# EAGLE board MOD-v2-5 (EAGLE 8.3.2)
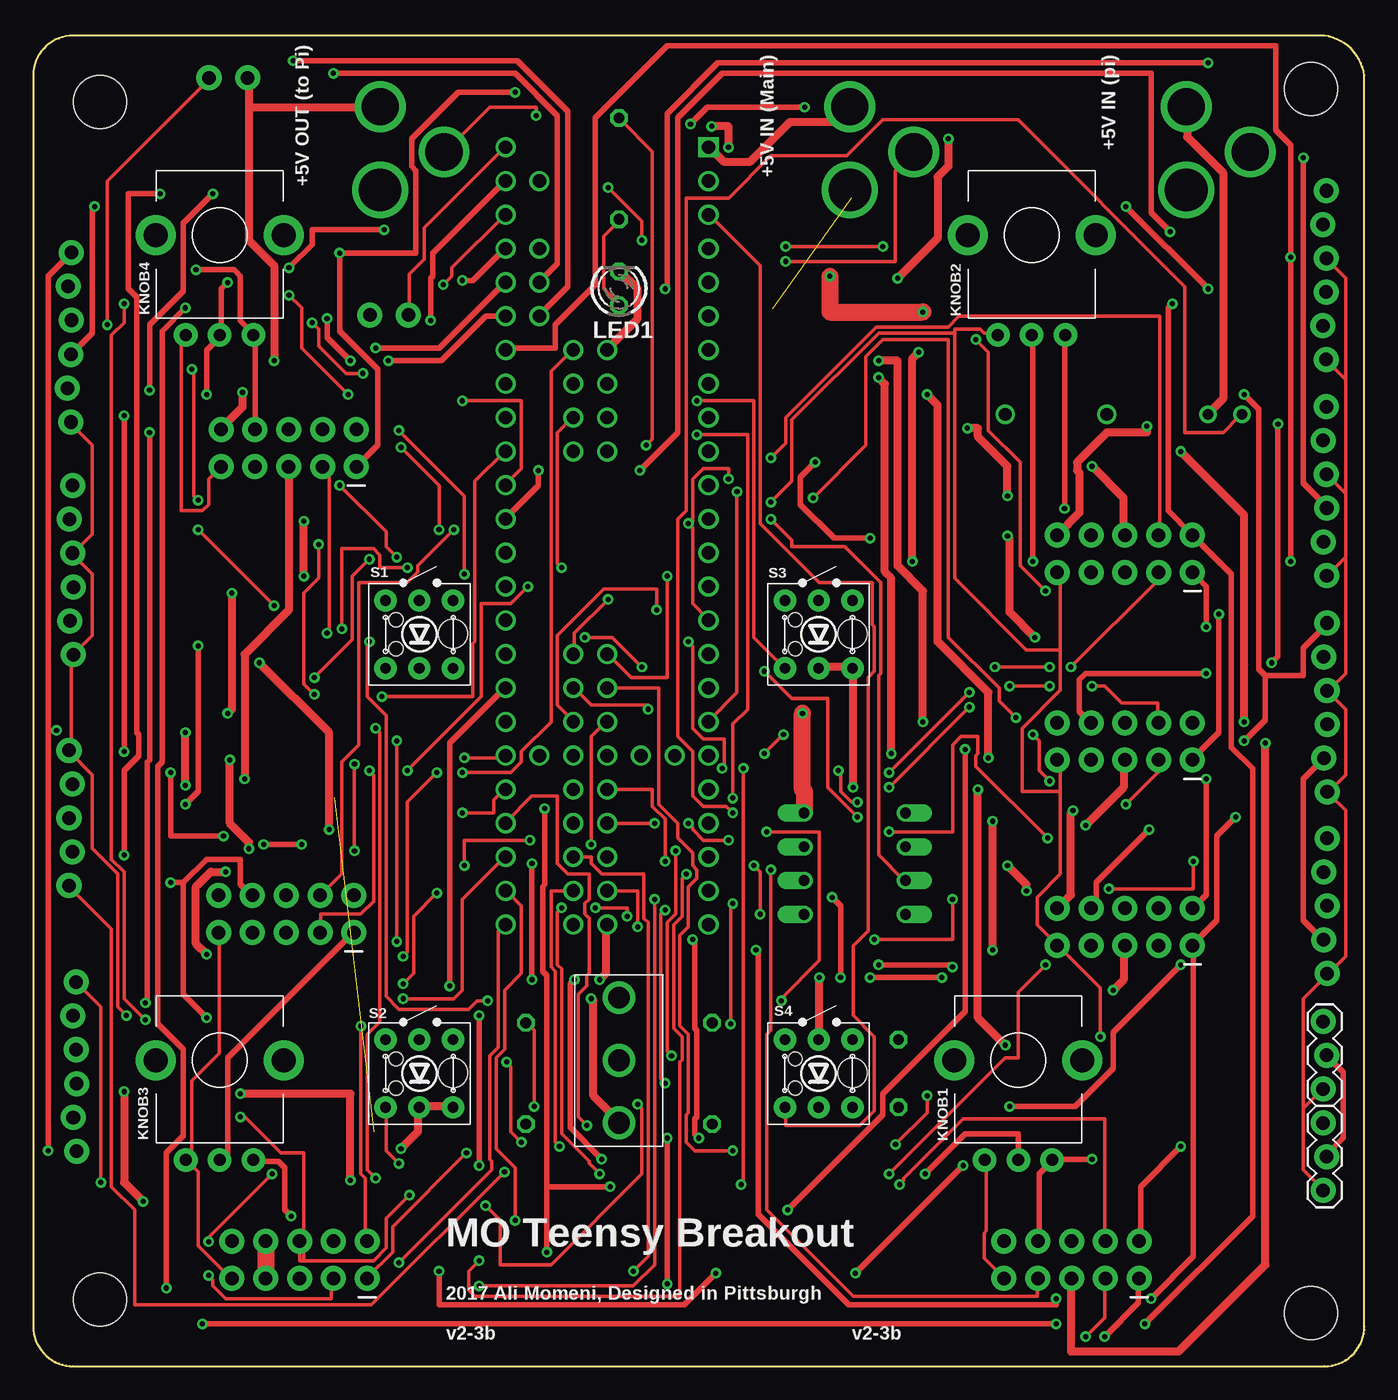
[diagram p0: board, top side]
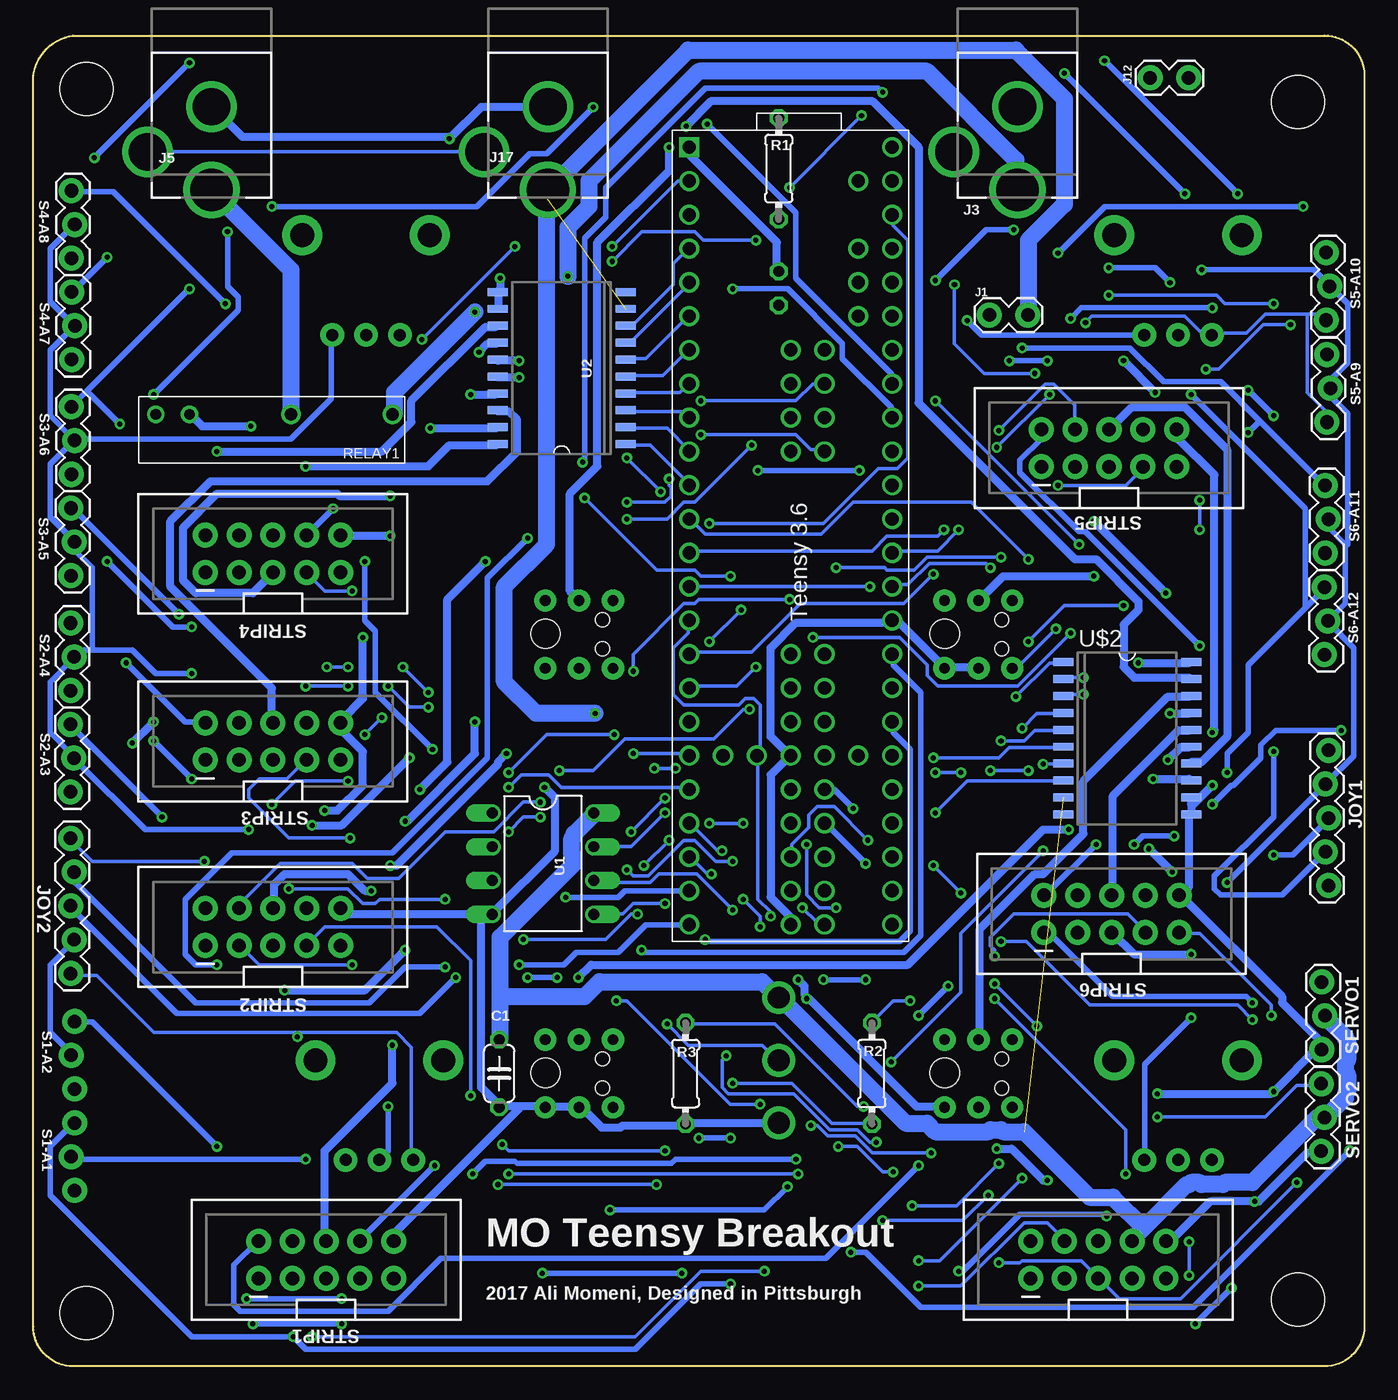
[diagram p1: board, bottom side, seen from below]

Size 100 x 100 mm. Coordinates in mm from the lower left corner, seen from the top.
Outline: 3,100 arc90 0,97 0,3 arc90 3,0 97,0 arc90 100,3 100,97 arc74 97,100 3,100
Copper layers (1*16): Top 0.035559375mm / dielectric 1.501140625mm / Bottom 0.035559375mm
Design rules "typical_4pcb *": minimum track width 10mil, minimum drill 15mil, track to track 6mil, track to pad 10mil, pad to pad 10mil, via to via 10mil, smd to smd 10mil, copper to edge 15mil, drill to drill 8mil, minimum pad ring 10mil, minimum via ring 8mil, stop-mask expansion 4mil, vias tented up to drill 0mil, thermal gap 10mil
Net classes: 2 Power: width 0.61 mm, clearance 0.305 mm; 3 Analog Sig: width 0.406 mm, clearance 0.305 mm; 4 Power Source: width 1.27 mm, clearance 0.305 mm
Holes 4 mm at 5,5 96,4 96,96 5,95

## Footprints (pad centres in the part's own frame; a part is rotated, then mirrored left to right if it is on the bottom)
C050-024X044 = drill 0.813 octagon: 1 -2.54,0; 2 2.54,0
1X02_LOCK = drill 1.016 pad 1.88: 1 -0.178,0; 2 2.718,0
DCJACK_2MM_PTH = drill 2.8: GND 0,7.35; GNDBREAK 4.8,10.75 | drill 3.2: PWR 0,13.6
2X5-SHROUDED_LOCK = drill 1.016 pad 1.88: 1 -1.397,5.08; 2 1.397,5.08; 3 -1.397,2.54; 4 1.397,2.54; 5 -1.397,0; 6 1.397,0; 7 -1.397,-2.54; 8 1.397,-2.54; 9 -1.397,-5.08; 10 1.397,-5.08
1X05_LOCK = drill 1.016 pad 1.88: 1 0,0.127; 2 2.54,-0.127; 3 5.08,0.127; 4 7.62,-0.127; 5 10.16,0.127
POT_ALPHA_RD901F-40-(L)R1 = drill 0.9 pad 1.778: 1 -2.54,-7.5; 2 0,-7.5; 3 2.54,-7.5 | drill 1.8 pad 3: M1 -4.8,0; M2 4.8,0
LED3MM = drill 0.813 octagon: A -1.27,0; K 1.27,0
0204/7 = drill 0.813 octagon: 1 -3.81,0; 2 3.81,0
G6DN-1A = drill 0.8: 1 0,0; 2 2.54,0 | drill 0.95: 5 10.16,0; 8 17.78,0
SWITCH_TR2-MOMENTARY-LED = drill 0.8 pad 1.676: 1 2.54,-2.54; 2 2.54,2.54; 3 -2.54,-2.54; 4 -2.54,2.54; A 0,2.54; C 0,-2.54 | hole 2.2: 2.53,0.05 | hole 1.05: -1.76,1.1; -1.76,-1.09
1X03_LOCK = drill 1.016 pad 1.88: 1 0,0.127; 2 2.54,-0.127; 3 5.08,0.127
1X03_LOCK@1 = drill 1.016 pad 1.88: 1 0,0.127; 2 2.54,-0.127; 3 5.08,0.127
SWITCH_SPDT_500SSP1S2M2QEA = drill 1.65: 1 -4.7,0; 2 0,0; 3 4.7,0
TEENSY3-6_NO-USB-HOST = drill 1: 0 3.81,1.27; 1 6.35,1.27; 2 8.89,1.27; 3 11.43,1.27; 3V3(1) 36.83,1.27; 3V3(2) 46.99,6.35; 3V3(3) 6.35,16.51; 3V3(4) 59.69,11.43; 4 13.97,1.27; 5 16.51,1.27; 6 19.05,1.27; 7 21.59,1.27; 8 24.13,1.27; 9 26.67,1.27; 10 29.21,1.27; 11 31.75,1.27; 12 34.29,1.27; 13 34.29,16.51; 14 31.75,16.51; 15 29.21,16.51; 16 26.67,16.51; 17 24.13,16.51; 18 21.59,16.51; 19 19.05,16.51; 20 16.51,16.51; 21 13.97,16.51; 22 11.43,16.51; 23 8.89,16.51; 24 39.37,1.27; 25 41.91,1.27; 26 44.45,1.27; 27 46.99,1.27; 28 49.53,1.27; 29 52.07,1.27; 30 54.61,1.27; 31 57.15,1.27; 32 59.69,1.27; 33 59.69,16.51; 34 57.15,16.51; 35 54.61,16.51; 36 52.07,16.51; 37 49.53,16.51; 38 46.99,16.51; 39 44.45,16.51; 40 39.37,8.89; 41 41.91,8.89; 42 44.45,8.89; 43 49.53,8.89; 44 52.07,8.89; 45 54.61,8.89; 46 57.15,8.89; 47 57.15,11.43; 48 54.61,11.43; 49 52.07,11.43; 50 49.53,11.43; 51 44.45,11.43; 52 41.91,11.43; 53 39.37,11.43; 54 24.13,11.43; 55 21.59,11.43; 56 19.05,11.43; 57 16.51,11.43; A10 11.43,13.97; A11 13.97,13.97; AGND 3.81,16.51; AREF 8.89,13.97; DAC0 41.91,16.51; DAC1 39.37,16.51; DC 21.59,8.89; DD 24.13,8.89; DE 19.05,8.89; G1 46.99,8.89; G2 36.83,16.51; G3 59.69,8.89; G6 16.51,8.89; P 46.99,11.43; R 46.99,13.97; VBAT 46.99,3.81; VIN 1.27,16.51; VUSB 3.81,13.97 | drill 1 square: G0 1.27,1.27
DIL08 = drill 0.813 offset: 1 -3.81,-3.81; 2 -1.27,-3.81; 3 1.27,-3.81; 4 3.81,-3.81; 5 3.81,3.81; 6 1.27,3.81; 7 -1.27,3.81; 8 -3.81,3.81
SOIC20 = smd 0.6 x 1.5: 1 -5.715,-4.8; 2 -4.445,-4.8; 3 -3.175,-4.8; 4 -1.905,-4.8; 5 -0.635,-4.8; 6 0.635,-4.8; 7 1.905,-4.8; 8 3.175,-4.8; 9 4.445,-4.8; 10 5.715,-4.8; 11 5.715,4.8; 12 4.445,4.8; 13 3.175,4.8; 14 1.905,4.8; 15 0.635,4.8; 16 -0.635,4.8; 17 -1.905,4.8; 18 -3.175,4.8; 19 -4.445,4.8; 20 -5.715,4.8

## Placement (x,y rotation side)
C1  10uF  [C050-024X044]  65,22 270 bottom
J1  Teensy-5V  [1X02_LOCK]  28,79 0 bottom
J3  +5V OUT (to Pi)  [DCJACK_2MM_PTH]  26.06,102 180 bottom
J4  ACTUATORS  [2X5-SHROUDED_LOCK]  20,8 90 bottom
J5  +5V IN (Pi)  [DCJACK_2MM_PTH]  86.61,102 180 bottom
J12  RPi-Shutdown  [1X02_LOCK]  13.38,96.82 180 bottom
J17  +5V IN (Main)  [DCJACK_2MM_PTH]  61.34,102 180 bottom
JOY1  JOY1  [1X05_LOCK]  2.81,46.28 270 bottom
JOY2  JOY2  [1X05_LOCK]  97.06,29.52 90 bottom
KNOB1  [POT_ALPHA_RD901F-40-(L)R1]  74,23 0 top
KNOB2  [POT_ALPHA_RD901F-40-(L)R1]  75,85 0 top
KNOB3  [POT_ALPHA_RD901F-40-(L)R1]  14,23 0 top
KNOB4  [POT_ALPHA_RD901F-40-(L)R1]  14,85 0 top
LED1  [LED3MM]  44,81 90 top
R1  330  [0204/7]  44,90 270 bottom
R2  2.2K  [0204/7]  37,22 90 bottom
R3  3.3K  [0204/7]  51,22 270 bottom
RELAY1  RELAY-OMRON-G6DN  [G6DN-1A]  90.8,71.54 0 bottom
S1  SW-LEDPTH  [SWITCH_TR2-MOMENTARY-LED]  29,55 0 top
S1-A1  AN5  [1X03_LOCK]  97.03,13.21 90 top
S1-A2  AN6  [1X03_LOCK]  97.03,20.83 90 top
S2  SW-LEDPTH  [SWITCH_TR2-MOMENTARY-LED]  29,22 0 top
S2-A3  AN7  [1X03_LOCK]  97.08,43.16 90 bottom
S2-A4  AN8  [1X03_LOCK]  97.06,50.77 90 bottom
S3  SW-LEDPTH  [SWITCH_TR2-MOMENTARY-LED]  59,55 0 top
S3-A5  AN5  [1X03_LOCK]  97.04,59.41 90 bottom
S3-A6  AN6  [1X03_LOCK]  97.02,67.03 90 bottom
S4  SW-LEDPTH  [SWITCH_TR2-MOMENTARY-LED]  59,22 0 top
S4-A7  AN7  [1X03_LOCK]  97,75.65 90 bottom
S4-A8  AN8  [1X03_LOCK]  97.01,83.26 90 bottom
S5-A9  AN5  [1X03_LOCK]  2.69,70.95 90 bottom
S5-A10  AN6  [1X03_LOCK]  2.74,78.61 90 bottom
S6-A11  AN7  [1X03_LOCK]  2.83,61.11 90 bottom
S6-A12  AN8  [1X03_LOCK]  2.88,53.47 90 bottom
SERVO1  SERVO1  [1X03_LOCK@1]  3.1,23.79 90 bottom
SERVO2  SERVO2  [1X03_LOCK@1]  3.13,16.16 90 bottom
STRIP1  [2X5-SHROUDED_LOCK]  78,8 90 bottom
STRIP2  [2X5-SHROUDED_LOCK]  82,33.01 90 bottom
STRIP3  [2X5-SHROUDED_LOCK]  82,46.96 90 bottom
STRIP4  [2X5-SHROUDED_LOCK]  82,61.05 90 bottom
STRIP5  [2X5-SHROUDED_LOCK]  19.19,69 90 bottom
STRIP6  [2X5-SHROUDED_LOCK]  19,33.99 90 bottom
SW2  500SSP1S2M2QEA  [SWITCH_SPDT_500SSP1S2M2QEA]  44,23 270 top
TEENSY  TEENSY3_6-ALI_NO-USB-HOST  [TEENSY3-6_NO-USB-HOST]  51.99,92.88 270 bottom
U1  ATTINY85  [DIL08]  61.71,37.77 270 bottom
U2  A2982  [SOIC20]  60.31,75.01 90 bottom
U$2  A2982  [SOIC20]  17.82,47.19 270 bottom

## Library data of the parts
C1 = resistor
J1 S1-A1 S1-A2 = SparkFun-Connectors
J3 J5 J17 = adafruit
J4 STRIP1-STRIP6 = SparkFun-Connectors; PROD_ID: CONN-08671; SF_ID: PRT-08506
J12 = SparkFun-Connectors; GND: GND; SIG: SIG
JOY1 = SparkFun-Connectors; B: B; GND: gnd; H: H; V: V; VCC: vcc
JOY2 = SparkFun-Connectors; B: B; GND: GND; H: H; V: V; VCC: VCC
KNOB1-KNOB4 RELAY1 S1-S4 TEENSY U1 U2 U$2 = CMU-ArtFab
LED1 = led; GND: -; P: +
R1-R3 = rcl
S2-A3 = SparkFun-Connectors; AN3: AN3; GND: GND; VCC: VCC
S2-A4 = SparkFun-Connectors; AN4: AN4; GND: GND; VCC: VCC
S3-A5 = SparkFun-Connectors; AN5: AN5; GND: GND; VCC: VCC
S3-A6 = SparkFun-Connectors; AN6: AN6; GND: GND; VCC: VCC
S4-A7 = SparkFun-Connectors; AN7: AN7; GND: GND; VCC: VCC
S4-A8 = SparkFun-Connectors; AN8: AN8; GND: GND; VCC: VCC
S5-A9 = SparkFun-Connectors; AN9: AN9; GND: GND; VCC: VCC
S5-A10 = SparkFun-Connectors; AN10: AN10; GND: GND; VCC: VCC
S6-A11 = SparkFun-Connectors; AN11: AN11; GND: GND; VCC: VCC
S6-A12 = SparkFun-Connectors; AN12: AN12; GND: GND; VCC: VCC
SERVO1 SERVO2 = SparkFun-Connectors; 5V: +5V; GND: GND; SIG: SIG
SW2 = CMU-ArtFab; DIGIKEY: EG5137-ND

## Nets
+3V3: J4.9 JOY1.1 JOY2.1 KNOB1.1 KNOB2.1 KNOB3.1 KNOB4.1 S1-A1.1 S1-A2.1 S2-A3.1 S2-A4.1 S3-A5.1 S3-A6.1 S4-A7.1 S4-A8.1 S5-A9.1 S5-A10.1 S6-A11.1 S6-A12.1 STRIP1.9 STRIP2.9 STRIP3.9 STRIP4.9 STRIP5.9 STRIP6.9 TEENSY.3V3(1) TEENSY.3V3(2) TEENSY.3V3(3) TEENSY.3V3(4)
+5V [Power Source]: C1.1 J1.2 J4.7 J4.8 J17.PWR SERVO1.2 SERVO2.2 SW2.1 U1.8 U2.9 U$2.9
+5V-BATTERY-PI [Power Source]: J5.PWR RELAY1.5
AGND [Analog Sig]: JOY1.2 JOY2.2 KNOB1.3 KNOB2.3 KNOB3.3 KNOB4.3 S1-A1.2 S1-A2.2 S2-A3.2 S2-A4.2 S3-A5.2 S3-A6.2 S4-A7.2 S4-A8.2 S5-A9.2 S5-A10.2 S6-A11.2 S6-A12.2 STRIP1.8 STRIP2.8 STRIP3.8 STRIP4.8 STRIP5.8 STRIP6.8 TEENSY.AGND
AN1 [Analog Sig]: S1-A1.3 STRIP1.1 TEENSY.39
AN2 [Analog Sig]: S1-A2.3 STRIP1.2 TEENSY.DAC0
AN3 [Analog Sig]: S2-A3.3 STRIP2.1 TEENSY.DAC1
AN4 [Analog Sig]: S2-A4.3 STRIP2.2 TEENSY.15
AN5 [Analog Sig]: S3-A5.3 STRIP3.1 TEENSY.18
AN6 [Analog Sig]: S3-A6.3 STRIP3.2 TEENSY.19
AN7 [Analog Sig]: S4-A7.3 STRIP4.1 TEENSY.20
AN8 [Analog Sig]: S4-A8.3 STRIP4.2 TEENSY.21
AN9 [Analog Sig]: KNOB1.2 S5-A9.3 STRIP5.1 TEENSY.49
AN10 [Analog Sig]: KNOB2.2 S5-A10.3 STRIP5.2 TEENSY.50
AN11 [Analog Sig]: KNOB3.2 S6-A11.3 STRIP6.1 TEENSY.22
AN12 [Analog Sig]: KNOB4.2 S6-A12.3 STRIP6.2 TEENSY.23
BTN1: STRIP1.3 TEENSY.48
BTN2: STRIP1.4 TEENSY.51
BTN3: STRIP2.3 TEENSY.42
BTN4: STRIP2.4 TEENSY.52
BTN5: STRIP3.3 TEENSY.40
BTN6: STRIP3.4 TEENSY.28
BTN7: STRIP4.3 TEENSY.27
BTN8: STRIP4.4 TEENSY.26
BTN9: STRIP5.3 TEENSY.25
BTN10: STRIP5.4 TEENSY.24
BTN11: STRIP6.3 TEENSY.12
BTN12: STRIP6.4 TEENSY.11
BTN13: S1.3 TEENSY.13
BTN14: S2.3 TEENSY.54
BTN15: S3.3 TEENSY.56
BTN16: S4.3 TEENSY.1
GND [Power]: C1.2 J3.GND J4.10 J5.GND J12.2 J17.GND LED1.K R3.2 RELAY1.2 S1.1 S1.C S2.1 S2.C S3.1 S3.C S4.1 S4.C SERVO1.1 SERVO2.1 STRIP1.10 STRIP2.10 STRIP3.10 STRIP4.10 STRIP5.10 STRIP6.10 SW2.3 TEENSY.G0 TEENSY.G1 TEENSY.G2 TEENSY.G3 TEENSY.G6 U1.4 U2.11 U2.12 U$2.11 U$2.12
GNDBREAK: J3.GNDBREAK J5.GNDBREAK J17.GNDBREAK
JOYB1: JOY1.5 TEENSY.47
JOYB2: JOY2.5 TEENSY.44
JOYH1 [Analog Sig]: JOY1.3 TEENSY.A11
JOYH2 [Analog Sig]: JOY2.3 TEENSY.31
JOYV1 [Analog Sig]: JOY1.4 TEENSY.A10
JOYV2 [Analog Sig]: JOY2.4 TEENSY.32
LED1: STRIP1.7 TEENSY.43
LED2: STRIP2.7 TEENSY.41
LED3: STRIP3.7 TEENSY.53
LED4: STRIP4.7 TEENSY.0
LED5: STRIP5.7 TEENSY.55
LED6: STRIP6.7 TEENSY.57
M_INA: J4.2 TEENSY.45
M_INB: J4.4 TEENSY.46
M_PWMA: J4.1 TEENSY.36
M_PWMB: J4.3 TEENSY.35
N$2: LED1.A R1.2
N$5: J12.1 R2.2 R3.1
N$7: J1.1 TEENSY.VIN
PI-REST: R2.1 U1.6
PWM1: TEENSY.2 U2.8
PWM2: TEENSY.3 U2.7
PWM3: TEENSY.4 U2.6
PWM4: TEENSY.5 U2.5
PWM5: TEENSY.6 U2.4
PWM6: TEENSY.7 U2.3
PWM7: TEENSY.8 U2.2
PWM8: TEENSY.9 U2.1
PWM9: TEENSY.37 U$2.8
PWM10: TEENSY.29 U$2.7
PWM11: TEENSY.38 U$2.6
PWM12: TEENSY.14 U$2.5
PWM13: TEENSY.30 U$2.4
PWM14: TEENSY.16 U$2.3
PWM15: TEENSY.10 U$2.2
PWM16: TEENSY.17 U$2.1
PWM_1 [Power]: STRIP1.5 U2.13
PWM_2 [Power]: STRIP1.6 U2.14
PWM_3 [Power]: STRIP2.5 U2.15
PWM_4 [Power]: STRIP2.6 U2.16
PWM_5 [Power]: STRIP3.5 U2.17
PWM_6 [Power]: STRIP3.6 U2.18
PWM_7 [Power]: STRIP4.5 U2.19
PWM_8 [Power]: STRIP4.6 U2.20
PWM_9 [Power]: STRIP5.5 U$2.13
PWM_10 [Power]: STRIP5.6 U$2.14
PWM_11 [Power]: STRIP6.5 U$2.15
PWM_12 [Power]: STRIP6.6 U$2.16
PWM_13 [Power]: S1.A U$2.17
PWM_14 [Power]: S2.A U$2.18
PWM_15 [Power]: S3.A U$2.19
PWM_16 [Power]: S4.A U$2.20
RELAY-PWR [Power Source]: J3.PWR RELAY1.8
S1: J4.5 SERVO1.3 TEENSY.33
S2: J4.6 SERVO2.3 TEENSY.34
TINY_LED: R1.1 U1.3
TINY_RELAY: RELAY1.1 U1.7
TINY_SWITCH: SW2.2 U1.5

## Tracks (layer width: path | path; a pad name or v marks a point on that pad's centre or on a via)
+3V3  (via drill 0.38)
  Top 0.254: J4.9 14.76,6.67 12.38,9.05 12.38,14.61 11.59,15.4 KNOB3.1 11.91,15.24 11.91,21.43 13.97,23.5 13.97,32.54 STRIP6.9 | STRIP5.9 13.97,67.47 13.18,66.67 13.18,64.77 12.7,64.29 11.11,64.29 11.11,77.15 11.43,77.47 KNOB4.1 | S5-A9.1 2.86,70.8 4.45,69.22 4.45,62.55 3.02,61.12 S6-A11.1 3.02,60.96 4.45,59.53 4.45,54.93 3.02,53.5 S6-A12.1 2.86,53.34 2.86,46.51 2.7,46.35 JOY1.1 2.7,46.2 4.45,44.45 4.45,38.89 6.35,36.99 6.35,26.99 v6.99,26.35 | v42.23,34.45 44.61,34.45 v44.61,33.81 | TEENSY.3V3(1) 50.64,56.2 49.53,57.31 49.53,63.02 v49.21,63.34 49.37,63.34 49.53,63.5 49.53,66.67 50.32,67.47 52.23,67.47 v52.23,66.67 | 77.15,43.18 77.15,45.4 76.99,45.56 STRIP3.9 | 77.15,43.18 77.15,36.99 75.41,35.24 75.41,33.18 76.83,31.75 STRIP2.9 76.99,31.59 80.17,28.42 v80.17,24.77 | 69.22,77.63 69.22,59.21 74.61,53.82 77.15,53.82 | 69.22,77.63 69.22,77.95 71.12,77.95 71.44,77.63 72.39,77.63 KNOB2.1 | 77.15,53.82 77.15,59.37 76.99,59.53 STRIP4.9 | 77.15,43.18 74.3,43.18 74.3,47.94 77.15,50.8 77.15,53.82 | 98.5,60.72 98.58,60.8 98.58,65.56 98.5,65.64 | 98.5,60.72 97.31,59.53 S3-A5.1 | 98.5,65.64 97.16,66.99 S3-A6.1 | 98.5,74.22 98.58,74.14 98.58,65.72 98.5,65.64 | 98.5,74.22 97.16,75.56 S4-A7.1 | S4-A8.1 97.16,83.19 98.58,81.76 98.58,74.3 98.5,74.22 | 98.5,60.72 98.58,60.64 98.58,52.07 97.31,50.8 S2-A4.1 97.31,50.64 98.58,49.37 98.58,44.45 97.31,43.18 S2-A3.1 97.31,43.02 98.58,41.75 98.58,30.8 97.31,29.53 JOY2.1 97.16,29.37 95.41,27.62 95.41,19.53 95.49,19.45 | KNOB1.1 71.6,15.4 71.6,10.16 71.44,10 71.44,8.1 72.87,6.67 STRIP1.9 | 95.49,19.45 96.84,20.8 S1-A2.1 | 95.49,19.45 95.41,19.37 95.41,14.76 96.84,13.34 S1-A1.1
  Top 0.254: v55.4,64.93 56.99,66.52 56.99,71.12 63.5,77.63 69.22,77.63 | v20.95,78.42 21.43,77.95 21.43,76.68 23.5,74.61 v24.77,74.61 | v30.8,81.28 31.43,81.92 31.43,82.55 35.4,86.52 TEENSY.3V3(3)
  Bottom 0.254: 4.29,79.06 3.33,79.06 3.02,78.74 S5-A10.1 | 4.29,79.06 7.46,79.06 8.89,77.63 11.43,77.63 KNOB4.1 11.59,77.63 12.22,77.63 13.49,78.9 20.48,78.9 v20.95,78.42 | 4.29,79.06 4.29,73.18 2.86,71.75 2.86,70.96 S5-A9.1 | v6.99,26.35 6.99,27.15 12.38,32.54 13.81,32.54 STRIP6.9 | v42.23,34.45 41.12,33.34 40.64,33.34 TEENSY.3V3(4) | v44.61,33.81 44.61,34.13 45.56,35.08 45.56,45.88 TEENSY.3V3(2) 45.56,46.04 45.4,46.2 45.4,49.69 45.88,50.16 46.51,50.16 46.99,49.69 51.12,49.69 51.91,50.48 51.91,53.98 50.8,55.09 50.8,56.04 TEENSY.3V3(1) | v49.21,63.34 40.64,63.34 36.51,67.47 35.08,67.47 34.29,68.26 34.29,84.61 35.4,85.72 35.4,86.52 TEENSY.3V3(3) | 80.17,25.08 90.96,25.08 95.25,29.37 97.16,29.37 JOY2.1 | 80.17,25.08 72.71,25.08 71.6,23.97 71.6,15.56 KNOB1.1 | 80.17,25.08 v80.17,24.77 | v52.23,66.67 52.23,66.2 52.07,66.04 52.07,65.41 52.55,64.93 v55.4,64.93 | v24.77,74.61 28.57,74.61 30.8,76.83 v30.8,81.28
+5V  (via drill 0.38)  (2 unrouted)
  Top 1.27: J4.7 17.46,6.67 17.46,9.37 J4.8 | v57.78,49.05 57.78,43.34 57.94,43.18 57.94,41.59 U1.8
  Bottom 1.27: J1.2 25.24,79.06 25.24,84.61 22.54,87.31 22.54,95.25 26.19,98.9 50.8,98.9 61.28,88.42 J17.PWR 61.44,87.79 61.44,61.75 64.61,58.58 64.61,51.44 62.23,49.05 v57.78,49.05 | SERVO1.2 2.86,26.19 1.43,24.77 1.43,24.61 1.27,24.45 1.27,23.02 1.43,22.86 1.43,22.07 1.27,21.91 1.27,20.64 1.43,20.48 1.43,20.16 2.86,18.73 SERVO2.2 3.49,18.73 8.41,13.81 10.48,13.81 10.64,13.65 12.22,13.65 12.38,13.81 13.02,13.81 13.18,13.65 13.34,13.65 16.59,10.4 | 16.59,10.4 17.3,9.68 17.3,9.53 J4.8 | 64.93,27.78 64.93,24.61 C1.1 | 64.93,27.78 64.93,32.23 59.37,37.78 59.37,38.26 59.53,38.42 59.53,39.69 59.37,39.85 59.37,40.01 57.94,41.43 U1.8 | 64.93,27.78 58.58,27.78 57.47,28.89 45.24,28.89 44.13,27.78 SW2.1 43.5,27.3 34.45,18.26 32.86,18.26 32.23,17.62 28.26,17.62 28.1,17.78 27.3,17.78 27.15,17.62 25.56,17.62 20.64,12.7 18.89,12.7 16.59,10.4
+5V-BATTERY-PI
  Bottom 1.27: RELAY1.5 80.64,71.6 80.64,82.39 86.52,88.27 J5.PWR
AGND  (via drill 0.38)
  Top 0.406: STRIP1.8 75.56,9.53 75.56,14.45 76.52,15.4 KNOB1.3 76.68,15.56 v79.53,15.56 | S1-A1.2 97.16,15.88 98.42,17.14 98.42,22.07 97.16,23.34 S1-A2.2 | v77.47,64.45 77.47,77.47 KNOB2.3 | v83.82,40.32 79.85,36.35 79.85,34.77 79.53,34.45 STRIP2.8 | v88.11,52.07 79.06,52.07 78.58,51.59 78.58,49.21 79.38,48.42 STRIP3.8 | JOY2.2 96.84,32.07 95.41,33.5 95.41,44.13 96.84,45.56 S2-A3.2 | v29.84,78.58 29.84,81.76 30,81.92 30,83.66 35.4,89.06 TEENSY.AGND | STRIP5.8 16.67,70.48 16.67,77.47 KNOB4.3 16.51,77.63 15.56,78.58 15.56,81.92 15.08,82.39 v12.22,82.39 | v13.02,26.19 11.27,27.94 11.27,36.35 | 11.27,36.35 13.02,38.1 15.56,38.1 15.56,36.2 16.35,35.4 STRIP6.8 | v10.32,36.35 11.27,36.35 | v61.75,6.99 v69.85,15.08 | v51.28,6.99 48.9,4.6 30.48,4.6 v30.48,7.14 | v19.37,11.27 18.89,11.75 18.89,14.92 18.41,15.4 16.67,15.4 KNOB3.3
  Bottom 0.406: JOY2.2 97,31.91 98.74,30.16 98.74,25.08 97.16,23.5 S1-A2.2 | v79.53,15.56 97,15.56 97.16,15.72 S1-A1.2 | S4-A8.2 97,85.72 98.74,83.98 98.74,80.01 97,78.26 S4-A7.2 97,78.11 98.74,76.36 98.74,71.44 97,69.69 S3-A6.2 | KNOB2.3 77.63,77.47 77.63,72.71 80.64,69.69 96.84,69.69 S3-A6.2 | v77.47,64.45 79.38,62.55 STRIP4.8 | v83.82,40.32 91.6,40.32 96.84,45.56 S2-A3.2 97,45.88 98.74,47.62 98.74,51.44 97,53.18 S2-A4.2 96.84,53.34 96.36,53.82 95.57,53.82 | v88.11,52.07 90.81,52.07 92.55,53.82 95.57,53.82 | 95.57,53.82 95.57,60.01 96.84,61.28 96.84,61.91 S3-A5.2 97,62.07 98.74,63.82 98.74,67.79 97,69.53 S3-A6.2 | v29.84,78.58 28.73,77.47 16.67,77.47 KNOB4.3 | v13.02,26.19 16.51,22.7 16.51,15.56 KNOB3.3 | 1.43,61.75 2.7,63.02 2.7,63.5 S6-A11.2 | 1.43,61.75 1.43,57.31 2.7,56.04 S6-A12.2 2.7,55.88 0.79,53.98 0.79,45.88 2.86,43.81 JOY1.2 3.02,43.66 v10.32,36.35 | 1.43,61.75 1.27,61.75 1.27,71.6 2.54,72.87 2.54,73.34 S5-A9.2 2.54,73.5 2.54,74.14 1.27,75.41 1.27,79.85 2.54,81.12 S5-A10.2 2.7,81.28 3.81,82.39 v12.22,82.39 | v69.85,15.08 75.41,9.53 STRIP1.8 | v51.28,6.99 v61.75,6.99 | v30.48,7.14 30.16,7.14 25.88,11.43 19.53,11.43 v19.37,11.27
AN1  (via drill 0.38)
  Top 0.406: v49.53,32.07 49.69,31.91 49.69,25.4 49.85,25.24 49.85,18.73 49.69,18.57 49.69,17.46 v50.01,17.14 | v47.62,6.19 v47.62,17.14 | v80.49,2.22 83.03,4.76 83.03,6.51 STRIP1.1
  Bottom 0.406: v49.53,32.07 49.37,31.91 34.92,31.91 34.13,32.7 34.13,46.35 35.4,47.62 35.4,48.42 TEENSY.39 | v47.62,17.14 v50.01,17.14 | v47.62,6.19 49.85,6.19 54.77,1.27 79.53,1.27 v80.49,2.22 88.11,2.22 98.74,12.86 98.74,16.51 97,18.26 S1-A1.3
AN2  (via drill 0.38)
  Top 0.406: v31.27,28.57 31.27,46.83 35.4,50.96 TEENSY.DAC0 | v33.5,15.08 v33.5,26.35 | v86.2,16.51 83.19,13.49 83.19,9.53 STRIP1.2
  Bottom 0.406: v33.5,26.35 v31.27,28.57 | v33.5,15.08 40.48,8.1 69.37,8.1 73.34,4.13 84.45,4.13 84.93,4.6 84.93,7.62 83.19,9.37 STRIP1.2 | v86.2,16.51 95.57,25.88 96.84,25.88 S1-A2.3
AN3  (via drill 0.38)
  Top 0.406: v54.29,31.27 54.45,31.11 54.45,11.43 61.28,4.6 76.83,4.6 v76.83,5.08 | v83.98,5.08 87.15,8.26 87.15,31.59 STRIP2.1 87.15,31.75 88.9,33.5 88.9,39.85 v90.33,41.27
  Bottom 0.406: v54.29,31.27 54.13,31.11 34.61,31.11 33.34,32.38 33.34,50.64 35.4,52.7 35.4,53.5 TEENSY.DAC1 | v83.98,5.08 v76.83,5.08 | v90.33,41.27 97.16,48.1 S2-A3.3
AN4  (via drill 0.38)
  Top 0.406: v37.94,67.31 37.94,66.2 35.56,63.82 TEENSY.15 | v45.56,67.31 48.42,70.17 48.42,93.82 51.75,97.16 83.98,97.16 83.98,86.68 v85.41,85.25 | v90.96,73.03 92.08,71.91 92.08,52.39 92.55,51.91 | 92.55,51.91 95.41,51.91 95.41,53.98 97.16,55.72 S2-A4.3 | v88.11,44.13 88.11,35.4 87.15,34.45 STRIP2.2 | v90.96,46.99 92.55,48.58 92.55,51.91
  Bottom 0.406: v45.56,67.31 v37.94,67.31 | v85.41,85.25 85.41,81.12 84.61,80.33 84.61,79.38 v90.96,73.03 | v90.96,46.99 v88.11,44.13
AN5  (via drill 0.38)
  Top 0.406: v47.47,80.96 47.62,81.12 47.62,94.14 51.44,97.95 v88.27,97.95 | v95.41,90.81 95.41,66.36 97.16,64.61 S3-A5.3 | v89.06,56.52 89.06,47.62 87.15,45.72 STRIP3.1
  Bottom 0.406: v47.47,80.96 43.34,80.96 39.21,76.83 39.21,75.72 35.56,72.07 35.56,71.44 TEENSY.18 | v95.41,90.81 v88.27,97.95 | v89.06,56.52 97.16,64.61 S3-A5.3
AN6  (via drill 0.38)
  Top 0.406: v49.37,93.34 50.64,94.61 v57.94,94.61 | v88.27,80.96 v82.07,87.15 | v93.03,52.86 93.5,53.34 v93.5,70.8
  Bottom 0.406: v49.37,93.34 42.7,86.68 42.7,81.76 35.56,74.61 35.56,73.98 TEENSY.19 | v57.94,94.61 61.44,91.12 62.71,91.12 66.67,87.15 v82.07,87.15 | 95.96,73.26 97,72.23 S3-A6.3 | 95.96,73.26 v88.27,80.96 | v93.03,52.86 88.58,48.42 87.15,48.42 STRIP3.2 | 95.96,73.26 v93.5,70.8
AN7  (via drill 0.38)
  Top 0.406: TEENSY.20 35.56,76.52 39.21,76.52 39.21,78.26 42.23,81.28 42.23,93.82 47.62,99.22 93.34,99.22 93.34,92.87 94.46,91.76 v94.46,83.34 v94.46,60.48 | v88.11,55.56 88.11,58.58 87.15,59.53 STRIP4.1
  Bottom 0.406: v94.46,83.34 97,80.8 S4-A7.3 | v88.11,55.56 89.53,55.56 v94.46,60.48
AN8  (via drill 0.38)
  Top 0.406: v26.67,75.56 30.64,75.56 33.97,78.9 35.4,78.9 TEENSY.21 | v23.81,75.56 22.07,77.31 v22.07,78.74 | v11.43,79.53 9.68,77.79 9.68,45.4 9.37,45.09 9.37,25.72 11.27,23.81 11.27,17.3 10,16.03 v10,5.87 | v76.83,3.17 v12.7,3.17 | v83.5,3.17 91.6,11.27 91.6,44.93 90.01,46.51 90.01,59.53 87.15,62.39 STRIP4.2 87,62.55 85.25,64.29 85.25,79.53 v85.57,79.85
  Bottom 0.406: v23.81,75.56 v26.67,75.56 | v22.07,78.74 21.27,79.53 v11.43,79.53 | v12.7,3.17 v10,5.87 | v83.5,3.17 v76.83,3.17 | v85.57,79.85 93.98,88.27 97,88.27 S4-A8.3
AN9  (via drill 0.38)
  Top 0.406: v4.6,87.15 4.45,87 4.45,77.63 2.86,76.04 S5-A9.3 | STRIP5.1 24.29,67.63 25.88,69.22 25.88,74.93 23.02,77.79 v23.02,83.66 28.73,83.66 28.73,89.85 28.42,90.17 28.42,92.23 31.91,95.73 v36.2,95.73 | v37.47,29.05 v37.47,37.78 | v40.64,29.05 40.32,28.73 40.32,17.94 v42.7,15.56 | v66.99,14.45 70.01,17.46 73.98,17.46 73.98,15.56 KNOB1.2 | v58.74,67.94 57.63,66.83 57.63,64.77 60.17,62.23 v62.87,62.23 | v86.2,30.16 81.12,25.08 81.12,22.38 78.26,19.53 v73.34,19.53
  Bottom 0.406: v23.02,83.66 19.53,87.15 v4.6,87.15 | v37.47,37.78 40.48,40.8 TEENSY.49 | v40.64,29.05 v37.47,29.05 | v42.7,15.56 51.75,15.56 52.07,15.24 63.66,15.24 63.82,15.4 66.04,15.4 v66.99,14.45 | v36.2,95.73 36.51,96.04 49.53,96.04 56.99,88.58 56.99,86.36 58.58,84.77 58.58,68.1 v58.74,67.94 | v62.87,62.23 65.88,59.21 65.88,45.72 73.03,38.58 85.09,38.58 88.58,35.08 88.58,30.96 87.79,30.16 v86.2,30.16 | v73.34,19.53 73.34,16.19 73.98,15.56 KNOB1.2
AN10  (via drill 0.38)
  Top 0.406: v38.42,41.91 38.42,36.2 38.26,36.04 38.26,29.69 38.58,29.37 38.58,13.49 | v38.58,8.57 38.58,13.49 | 1.11,47.78 1.11,81.92 2.86,83.66 S5-A10.3 | 1.11,47.78 v1.11,16.19 | v75.09,60.48 75.09,77.47 KNOB2.2 | v70.01,46.35 70.01,26.67 63.82,20.48 63.82,18.89 v56.67,11.75 | 38.58,13.49 v43.34,13.49 | v12.38,54.13 12.38,43.18 v11.43,42.23 | 1.11,47.78 v1.75,47.78
  Bottom 0.406: v38.42,41.91 39.85,43.34 40.48,43.34 TEENSY.50 | v38.58,8.57 37.47,8.57 33.34,4.45 12.86,4.45 v1.11,16.19 | v75.09,60.48 75.09,56.04 74.3,55.24 74.3,50.64 v70.01,46.35 | v56.67,11.75 45.09,11.75 v43.34,13.49 | v12.38,54.13 20.95,62.71 21.43,62.71 25.88,67.15 25.88,68.1 24.29,69.69 24.29,70.33 STRIP5.2 | v11.43,42.23 10,43.66 9.84,43.66 7.78,45.72 7.78,46.67 6.67,47.78 v1.75,47.78
AN11  (via drill 0.38)
  Top 0.406: KNOB3.2 14.13,15.56 14.61,16.03 14.61,23.18 23.97,32.54 STRIP6.1 | v25.72,76.52 30.48,76.52 35.4,81.44 TEENSY.22 | v8.41,27.3 8.57,27.46 8.57,45.4 8.73,45.56 v8.73,70.17
  Bottom 0.406: v25.72,76.52 17.62,76.52 15.08,73.98 10.79,73.98 7.86,71.04 | 7.86,71.04 3.02,66.2 S6-A11.3 | v8.41,27.3 8.89,27.78 18.89,27.78 23.65,32.54 23.97,32.54 STRIP6.1 | 7.86,71.04 v8.73,70.17
AN12  (via drill 0.38)
  Top 0.406: v32.23,81.6 33.02,81.6 35.4,83.98 TEENSY.23 | v26.35,85.41 20.95,85.41 20.95,84.3 v19.21,82.55 | v14.61,81.44 14.13,80.96 14.13,77.63 KNOB4.2 13.97,77.31 13.02,76.36 v13.02,73.03 | v17.3,39.21 v20.16,39.21 | v14.29,39.85 10.32,39.85 v10.32,44.61
  Bottom 0.406: v32.23,81.6 28.42,85.41 v26.35,85.41 | v19.21,82.55 15.72,82.55 v14.61,81.44 | v20.16,39.21 23.97,35.4 STRIP6.2 | v17.3,39.21 16.67,39.85 v14.29,39.85 | v10.32,44.61 10.32,46.04 8.73,47.62 8.73,52.7 4.37,57.07 | 4.37,57.07 3.02,58.42 S6-A12.3 | v13.02,73.03 4.45,64.45 4.45,57.15 4.37,57.07
BTN1  (via drill 0.38)
  Top 0.254: v45.09,7.14 46.2,8.26 46.2,33.34 45.88,33.66 45.88,36.99 42.7,36.99 41.91,37.78 41.91,38.26 40.64,38.26 TEENSY.48 | v79.06,2.22 80.49,3.65 80.49,6.51 STRIP1.3
  Bottom 0.254: v45.09,7.14 49.85,7.14 54.77,2.22 v79.06,2.22
BTN2  (via drill 0.38)
  Top 0.254: v46.83,56.83 46.83,58.42 42.86,58.42 39.37,54.93 39.37,49.69 40.48,48.58 TEENSY.51 | v49.21,54.45 49.53,54.13 49.53,47.94 50.32,47.15 51.91,47.15 51.91,45.09 v51.75,44.93 | v53.34,44.93 53.34,13.81 v53.18,13.65 | v65.09,13.65 65.41,13.97 65.41,14.13 69.85,18.57 80.49,18.57 80.49,9.53 STRIP1.4
  Bottom 0.254: v49.21,54.45 v46.83,56.83 | v53.34,44.93 v51.75,44.93 | v65.09,13.65 v53.18,13.65
BTN3  (via drill 0.38)
  Top 0.254: v41.91,39.21 41.91,47.31 43.02,48.42 TEENSY.42 | v39.69,34.45 39.37,34.13 39.37,30.16 39.69,29.84 39.69,17.46 41.75,15.4 41.75,15.24 v42.55,14.45 | v64.29,14.45 73.03,23.18 73.98,23.18 73.98,28.1 v76.04,30.16
  Bottom 0.254: v41.91,39.21 41.91,35.4 40.96,34.45 v39.69,34.45 | v64.29,14.45 v42.55,14.45 | v76.04,30.16 83.03,30.16 84.45,31.59 STRIP2.3
BTN4  (via drill 0.38)
  Top 0.254: v46.2,49.37 46.2,49.69 41.91,49.69 40.64,50.96 TEENSY.52 | v60.48,44.77 60.64,44.61 60.64,43.18 61.44,42.39 v61.91,42.39
  Bottom 0.254: v46.2,49.37 46.67,49.37 48.9,47.15 55.56,47.15 57.94,44.77 v60.48,44.77 | v61.91,42.39 63.18,42.39 65.41,40.16 69.06,40.16 72.55,36.67 74.93,36.67 76.04,37.78 81.44,37.78 84.45,34.77 84.45,34.45 STRIP2.4
BTN5  (via drill 0.38)
  Top 0.254: v47.62,59.37 47.62,51.75 44.93,51.75 43.18,53.5 TEENSY.40 | v58.58,65.25 62.55,69.22 62.55,75.88 63.82,77.15 68.74,77.15 68.74,54.77 72.55,50.96 72.55,50.01 v73.82,48.74 | v75.09,47.47 75.56,46.99 75.56,44.77 v76.36,43.97 | v82.07,42.23 84.45,44.61 84.45,45.56 STRIP3.3
  Bottom 0.254: v47.62,59.37 49.85,59.37 50.32,59.85 53.18,59.85 v58.58,65.25 | v75.09,47.47 v73.82,48.74 | v76.36,43.97 80.33,43.97 v82.07,42.23
BTN6  (via drill 0.38)
  Top 0.254: v70.33,49.53 v64.29,43.5 | v76.36,51.12 v73.34,51.12 | v79.53,51.12 80.49,51.12 81.76,49.85 84.45,49.85 84.45,48.42 STRIP3.4
  Bottom 0.254: v64.29,43.5 63.34,44.45 61.28,44.45 60.33,43.5 50.8,43.5 TEENSY.28 | v70.33,49.53 71.75,49.53 v73.34,51.12 | v79.53,51.12 v76.36,51.12
BTN7  (via drill 0.38)
  Top 0.254: v56.36,47.47 v54.93,46.04 | v70.33,50.64 v64.29,44.61 | v76.36,52.55 v72.23,52.55 | v77.95,52.55 84.45,59.05 84.45,59.53 STRIP4.3
  Bottom 0.254: v54.93,46.04 50.8,46.04 TEENSY.27 | v56.36,47.47 61.44,47.47 v64.29,44.61 | v72.23,52.55 v70.33,50.64 | v77.95,52.55 v76.36,52.55
BTN8  (via drill 0.38)
  Top 0.254: v52.86,65.72 52.86,50.64 50.8,48.58 TEENSY.26 | v55.4,68.26 56.52,69.37 56.52,71.28 63.34,78.11 68.74,78.11 69.53,78.9 84.61,78.9 84.61,62.55 STRIP4.4
  Bottom 0.254: v55.4,68.26 v52.86,65.72
BTN9  (via drill 0.38)
  Top 0.254: v45.72,52.55 43.5,54.77 v41.43,54.77 | v22.07,55.09 22.23,55.24 22.23,66.99 21.75,67.47 STRIP5.3
  Bottom 0.254: v45.72,52.55 47.15,51.12 50.64,51.12 TEENSY.25 | v41.43,54.77 34.92,54.77 32.86,52.7 32.86,51.91 32.07,51.12 26.04,51.12 v22.07,55.09
BTN10  (via drill 0.38)
  Top 0.254: v32.38,59.53 32.38,65.41 v27.46,70.33
  Bottom 0.254: v32.38,59.53 34.61,57.31 42.39,57.31 46.04,53.66 50.64,53.66 TEENSY.24 | v27.46,70.33 23.97,73.82 23.34,73.82 21.75,72.23 21.75,70.48 STRIP5.4
BTN11  (via drill 0.38)
  Top 0.254: v37.15,58.58 35.88,57.31 33.66,57.31 33.66,50.32 v28.1,44.77 | v25.24,44.77 25.56,44.45 25.56,34.92 24.61,33.97 21.59,33.97 21.59,32.7 STRIP6.3
  Bottom 0.254: v37.15,58.58 50.64,58.58 TEENSY.12 | v25.24,44.77 v28.1,44.77
BTN12  (via drill 0.38)
  Top 0.254: v31.59,62.87 28.89,60.17 28.89,59.69 28.1,58.9 24.45,58.9 24.45,46.67 23.18,45.4 23.18,36.99 21.59,35.4 STRIP6.4
  Bottom 0.254: v31.59,62.87 32.07,62.39 35.88,62.39 36.99,61.28 50.64,61.28 TEENSY.11
BTN13  (via drill 0.38)
  Top 0.254: v28.1,60.01 26.04,60.01 26.04,60.96 25.56,61.44 23.18,61.44 v23.18,55.4
  Bottom 0.254: v28.1,60.01 28.42,60.33 32.7,60.33 34.29,58.74 35.4,58.74 TEENSY.13 | v23.18,55.4 26.19,52.39 26.35,52.39 S1.3
BTN14  (via drill 0.38)
  Top 0.254: v49.85,70.01 53.66,70.01 53.66,49.37 52.55,48.26 v52.55,42.7 | v55.09,40.16 59.05,40.16 59.05,30.48 56.2,27.62 v56.2,27.46 | v45.4,19.68 45.72,19.37 45.72,14.45 38.89,7.62 35.08,7.62 35.08,10.95 v33.97,12.06 | v27.46,15.24 26.51,16.19 26.51,19.37 S2.3
  Bottom 0.254: v49.85,70.01 42.7,70.01 41.59,68.9 40.64,68.9 TEENSY.54 | v55.09,40.16 v52.55,42.7 | v56.2,27.46 55.4,27.46 47.62,19.68 v45.4,19.68 | v33.97,12.06 30.64,12.06 v27.46,15.24
BTN15  (via drill 0.38)
  Top 0.254: v49.85,72.55 54.13,72.55 54.13,54.77 56.36,52.55 S3.3
  Bottom 0.254: v49.85,72.55 42.7,72.55 41.43,73.82 40.64,73.82 TEENSY.56
BTN16
  Top 0.254: TEENSY.1 50.8,86.52 54.61,82.71 54.61,63.34 59.05,58.9 63.02,58.9 63.02,55.72 63.18,55.56 63.18,52.23 62.71,51.75 62.71,32.7 61.59,31.59 61.59,26.35 63.18,24.77 63.18,19.21 62.07,18.1 56.52,18.1 56.52,19.37 S4.3
GND  (via drill 0.38)
  Top 0.61: v15.72,73.18 15.72,72.07 14.13,70.48 STRIP5.10 | v18.1,75.56 18.1,82.71 16.19,84.61 16.19,94.61 | 16.19,94.61 16.19,96.68 J12.2 | 16.19,94.61 26.04,94.61 J3.GND | v8.26,12.38 6.83,13.81 v6.83,20.64 | v11.43,43.66 v11.43,47.62 | LED1.K 44.13,82.23 45.4,80.96 45.4,78.74 43.18,76.52 TEENSY.G6 | v64.93,81.76 67.94,84.77 67.94,89.38 68.74,90.17 v68.74,92.23 | TEENSY.G0 50.8,91.6 51.91,90.49 53.82,90.49 56.83,93.5 61.28,93.5 61.28,94.61 J17.GND | RELAY1.2 88.27,71.6 89.38,72.71 89.38,89.69 86.68,92.39 86.68,94.61 J5.GND | v83.66,70.64 83.66,70.17 80.64,70.17 78.42,67.94 78.42,67.31 78.58,67.15 78.58,64.14 76.99,62.55 STRIP4.10 | S2.1 31.43,19.53 29.05,19.53 S2.C 28.89,19.21 28.89,17.62 v27.62,16.35 | v42.55,29.05 43.02,29.53 43.02,33.18 TEENSY.G3 | S3.C 59.05,52.55 61.44,52.55 S3.1 61.59,52.23 v61.59,43.5 | v78.11,41.75 77.95,41.59 77.95,35.4 76.99,34.45 STRIP2.10 | v41.91,27.62 42.07,27.46 42.07,20.32 43.97,18.41 SW2.3 | v73.18,62.39 73.34,62.23 73.34,56.67 v75.25,54.77 | v15.56,20.48 23.81,20.48 v23.81,13.97
  Bottom 0.61: v18.1,75.56 v15.72,73.18 | J4.10 14.76,9.53 14.45,9.53 11.59,12.38 v8.26,12.38 7.94,12.38 4.29,16.03 3.33,16.03 SERVO2.1 | 13.02,42.23 13.02,42.7 U$2.12 | 13.02,42.23 13.02,41.59 U$2.11 13.18,41.27 13.18,36.04 13.81,35.4 STRIP6.10 13.65,35.24 6.19,27.78 6.19,27.3 3.33,24.45 3.33,23.81 SERVO1.1 3.49,23.97 v6.83,20.64 6.99,20.48 v15.56,20.48 | v11.43,47.62 11.27,47.78 11.27,66.99 13.97,69.69 13.97,70.33 STRIP5.10 | v11.43,43.66 12.86,42.23 13.02,42.23 | TEENSY.G0 50.64,91.6 50.64,90.96 44.13,84.45 44.13,82.39 LED1.K | U2.12 65.09,79.53 65.09,80.64 U2.11 64.93,80.96 v64.93,81.76 | J17.GND 61.44,94.61 66.36,94.61 v68.74,92.23 68.9,92.39 84.3,92.39 86.52,94.61 J5.GND | v83.66,70.64 87.31,70.64 88.11,71.44 RELAY1.2 | S1.C 29.05,52.55 31.27,52.55 S1.1 31.59,52.55 35.08,56.04 35.4,56.04 TEENSY.G2 35.72,55.88 42.7,55.88 44.61,53.98 44.61,47.31 43.34,46.04 TEENSY.G1 43.18,45.88 44.61,44.45 44.61,35.24 43.18,33.81 43.18,33.34 TEENSY.G3 | 41.83,27.7 42.07,27.94 42.07,28.57 v42.55,29.05 | 41.83,27.7 33.66,19.53 31.59,19.53 S2.1 | U1.4 65.56,33.97 76.52,33.97 76.83,34.29 STRIP2.10 | v78.11,41.75 77.15,41.75 75.25,43.66 75.25,46.2 76.83,47.78 76.83,48.26 STRIP3.10 76.83,48.58 75.25,50.16 v75.25,54.77 | v61.59,43.5 60.8,42.7 60.8,38.73 65.41,34.13 U1.4 | SW2.3 44.13,18.26 50.96,18.26 R3.2 51.28,18.1 55.72,18.1 55.88,17.94 57.31,17.94 58.74,19.37 S4.C 59.05,19.53 61.28,19.53 S4.1 61.59,19.53 63.5,19.53 | 63.5,19.53 64.93,19.53 C1.2 65.09,19.68 66.36,20.95 66.36,33.81 U1.4 | STRIP1.10 72.87,9.53 72.87,10 63.5,19.37 63.5,19.53 | v41.91,27.62 41.83,27.7
  Bottom 0.61: v73.18,62.39 76.83,62.39 STRIP4.10 | v23.81,13.97 24.13,13.97 26.51,16.35 v27.62,16.35
GNDBREAK  (via drill 0.38)
  Top 0.254: v37.78,93.98 37.78,94.61 34.29,94.61 30.96,91.28 J3.GNDBREAK | v43.18,88.58 45.72,86.04 v45.72,84.61 | v56.52,83.03 64.77,83.03 64.77,89.85 66.04,91.12 J17.GNDBREAK
  Bottom 0.254: v43.18,88.58 v37.78,93.98 | v45.72,84.61 49.69,84.61 50.32,85.25 54.29,85.25 v56.52,83.03 | J5.GNDBREAK 91.28,91.28 66.2,91.28 J17.GNDBREAK
JOYB1  (via drill 0.38)
  Top 0.254: v39.53,16.51 39.21,16.83 39.21,29.69 38.89,30 38.89,35.72 40.48,35.72 TEENSY.47 | v35.4,14.61 25.4,4.6 7.62,4.6 7.62,11.75 5.87,13.49 5.87,32.86 2.7,36.04 JOY1.5
  Bottom 0.254: v39.53,16.51 38.1,16.51 36.2,14.61 v35.4,14.61
JOYB2  (via drill 0.38)
  Top 0.254: v46.67,40.8 43.18,40.8 TEENSY.44 | v49.21,40.8 49.53,40.48 49.53,40.32 50.32,39.53 v52.23,39.53 | v54.13,37.62 54.61,37.15 v54.61,33.97 | v63.18,32.07 69.06,32.07 v69.06,35.08 | v80.8,35.88 87.15,35.88 v87.15,37.94
  Bottom 0.254: v49.21,40.8 v46.67,40.8 | v54.13,37.62 v52.23,39.53 | v54.61,33.97 55.09,33.97 56.99,32.07 v63.18,32.07 | v69.06,35.08 73.98,35.08 74.3,34.77 75.25,34.77 76.36,35.88 v80.8,35.88 | v87.15,37.94 95.57,37.94 97.16,39.53 JOY2.5
JOYH1  (via drill 0.38)
  Top 0.406: v19.53,98.11 36.35,98.11 40.16,94.3 40.16,81.12 38.1,79.06 TEENSY.A11 | v9.53,88.11 7.14,88.11 7.14,80.96 7.78,80.33 7.78,47.62 7.94,47.47 7.94,45.88 6.83,44.77 v6.83,38.42
  Bottom 0.406: v9.53,88.11 v19.53,98.11 | v6.83,38.42 5.4,38.42 2.7,41.12 JOY1.3
JOYH2  (via drill 0.38)
  Top 0.406: v60.01,35.24 60.64,34.61 v60.64,29.21 | v68.26,29.21 v62.87,29.21
  Bottom 0.406: v60.01,35.24 56.04,35.24 55.56,35.72 50.8,35.72 TEENSY.31 | v62.87,29.21 v60.64,29.21 | v68.26,29.21 70.96,26.51 89.22,26.51 97.16,34.45 JOY2.3
JOYV1  (via drill 0.38)
  Top 0.406: v22.54,97.16 36.2,97.16 39.37,93.98 39.37,82.87 38.1,81.6 TEENSY.A10 | v13.49,88.11 11.27,85.88 11.27,80.8 8.73,78.26 v8.73,73.34 | v6.83,46.2 v6.83,71.44
  Bottom 0.406: v13.49,88.11 v22.54,97.16 | v6.83,71.44 v8.73,73.34 | v6.83,46.2 6.83,41.27 11.27,36.83 11.27,35.88 10.79,35.4 6.19,35.4 3.02,38.58 JOY1.4
JOYV2  (via drill 0.38)
  Top 0.406: v63.5,30.16 69.06,30.16 v69.06,30
  Bottom 0.406: v63.5,30.16 60.17,30.16 59.21,31.11 56.04,31.11 53.98,33.18 50.8,33.18 TEENSY.32 | v69.06,30 72.07,30 74.77,27.3 87.79,27.3 96.84,36.35 96.84,36.99 JOY2.4
LED1  (via drill 0.38)
  Top 0.254: v47.47,37.94 47.47,41.12 46.51,42.07 46.51,43.34 43.18,43.34 TEENSY.43 | v55.4,37.31 55.4,25.24 55.09,24.92 55.09,11.75 61.59,5.24 75.41,5.24 75.41,6.51 STRIP1.7
  Bottom 0.254: v47.47,37.94 48.74,37.94 50.32,39.53 51.12,39.53 53.82,36.83 54.93,36.83 v55.4,37.31
LED2  (via drill 0.38)
  Top 0.254: v52.55,16.19 49.69,16.19 49.05,16.83 49.05,18.89 49.21,19.05 49.21,24.92 48.58,25.56 48.58,32.38 49.21,33.02 49.21,36.04 49.85,36.67 49.85,37.31 49.53,37.62 49.53,38.58 48.42,39.69 48.42,40.8 46.99,42.23 46.99,50.96 43.18,50.96 TEENSY.41 | v64.77,16.67 67.15,19.05 v67.15,20.32
  Bottom 0.254: v52.55,16.19 64.29,16.19 v64.77,16.67 | v67.15,20.32 67.15,30.48 69.69,33.02 78.11,33.02 79.38,31.75 STRIP2.7
LED3  (via drill 0.38)
  Top 0.254: v43.18,57.63 40.64,55.09 40.64,53.66 TEENSY.53 | v54.93,52.23 56.99,50.16 59.69,50.16 59.69,43.5 v61.91,41.27 | v64.29,40.16 69.06,40.16 69.06,46.67 69.69,47.31 70.96,47.31 70.96,46.04 70.8,45.88 70.8,45.09 v76.2,39.69
  Bottom 0.254: v43.18,57.63 50.01,57.63 50.32,57.31 51.12,57.31 54.93,53.5 v54.93,52.23 | v61.91,41.27 63.18,41.27 v64.29,40.16 | v76.2,39.69 80.8,39.69 83.82,42.7 83.82,43.34 83.03,44.13 80.96,44.13 79.53,45.56 STRIP3.7
LED4  (via drill 0.38)
  Top 0.254: v63.82,84.14 v56.52,84.14 | v70.8,77.15 71.75,76.2 71.75,70.33 74.14,67.94 74.14,60.17 v76.04,58.26
  Bottom 0.254: v56.52,84.14 51.59,89.06 50.8,89.06 TEENSY.0 | v70.8,77.15 v63.82,84.14 | v76.04,58.26 78.11,58.26 79.38,59.53 STRIP4.7
LED5  (via drill 0.38)
  Top 0.254: v39.69,60.01 39.37,60.33 39.37,70.17 40.48,71.28 TEENSY.55 | v27.3,60.8 26.51,61.59 26.51,62.71 v23.02,66.2
  Bottom 0.254: v39.69,60.01 36.04,60.01 35.88,59.85 33.81,59.85 32.86,60.8 v27.3,60.8 | v23.02,66.2 17.94,66.2 16.67,67.47 STRIP5.7
LED6  (via drill 0.38)
  Top 0.254: v32.23,44.61 35.88,44.61 36.67,45.4 36.67,46.2 38.89,48.42 38.89,74.77 40.48,76.36 TEENSY.57 | v30.32,44.61 28.1,42.39 28.1,31.11 v27.78,30.8
  Bottom 0.254: v30.32,44.61 v32.23,44.61 | v27.78,30.8 27.78,31.27 28.1,31.59 28.1,32.23 26.35,33.97 17.78,33.97 16.51,32.7 STRIP6.7
M_INA  (via drill 0.38)
  Top 0.254: v37.31,39.53 32.38,39.53 v32.38,37.62 | v30.32,35.56 28.57,33.81 28.57,29.53 v27.78,28.73 | v24.61,25.56 24.61,14.45 24.92,14.13 24.92,9.53 J4.2
  Bottom 0.254: v37.31,39.53 39.85,42.07 41.12,42.07 41.75,41.43 41.75,40.48 43.02,39.21 43.02,38.42 TEENSY.45 | v30.32,35.56 v32.38,37.62 | v24.61,25.56 v27.78,28.73
M_INB  (via drill 0.38)
  Top 0.254: v45.4,33.02 45.4,35.72 43.18,35.72 TEENSY.46 | v46.67,35.08 46.67,7.62 45.09,6.03 v33.5,6.03
  Bottom 0.254: v45.4,33.02 45.4,33.81 v46.67,35.08 | v33.5,6.03 30.32,6.03 25.56,10.79 23.81,10.79 22.54,9.53 J4.4
M_PWMA  (via drill 0.38)
  Top 0.254: v41.59,18.1 40.96,18.73 40.96,27.94 41.59,28.57 41.59,29.37 41.75,29.53 41.75,33.66 41.43,33.97 41.43,34.77 41.75,35.08 41.75,36.99 40.16,36.99 39.37,37.78 39.37,42.86 37.47,42.86 35.56,40.96 TEENSY.36 | v32.54,16.03 26.99,10.48 26.99,8.57 25.08,6.67 J4.1
  Bottom 0.254: v41.59,18.1 41.12,18.1 40.32,17.3 38.26,17.3 36.99,16.03 v32.54,16.03
M_PWMB  (via drill 0.38)
  Top 0.254: v27.78,27.62 31.59,27.62 32.23,28.26 32.23,35.08 35.4,38.26 TEENSY.35 | v17.94,14.45 13.18,9.68 v13.18,9.37 | v13.18,6.83 13.49,6.51 13.49,6.03 14.45,5.08 22.38,5.08 22.38,6.51 J4.3
  Bottom 0.254: v27.78,27.62 17.94,17.78 v17.94,14.45 | v13.18,6.83 v13.18,9.37
N$2
  Top 0.254: LED1.A 43.97,79.85 42.86,80.96 42.86,84.93 43.97,86.04 R1.2
N$5  (via drill 0.38)
  Top 0.254: v37.62,19.53 37.62,25.24 37.15,25.72 R2.2 | v5.56,78.26 5.56,89.06 13.18,96.68 J12.1 | v11.91,74.93 12.06,74.77 12.06,65.41 v12.38,65.09 | v18.1,57.15 v12.38,62.87 | v25.24,54.45 25.08,54.29 25.08,50.32 26.51,48.9 26.51,27.78 27.46,26.83 32.7,26.83 33.34,27.46 v34.13,27.46
  Bottom 0.254: v37.62,19.53 38.1,19.53 44.29,25.72 50.96,25.72 R3.1 | v5.56,78.26 7.62,78.26 10.95,74.93 v11.91,74.93 | v12.38,62.87 v12.38,65.09 | v18.1,57.15 22.54,57.15 v25.24,54.45 | v34.13,27.46 35.4,27.46 36.99,25.88 R2.2
N$7
  Top 0.254: TEENSY.VIN 35.4,91.6 29.37,85.57 29.37,83.19 28.26,82.07 28.26,79.06 J1.1
PI-REST  (via drill 0.38)
  Top 0.254: v47.47,21.27 47.15,21.59 47.15,33.97 v47.47,34.29
  Bottom 0.254: v47.47,21.27 43.02,21.27 40.01,18.26 37.15,18.26 R2.1 | v47.47,34.29 50.16,36.99 53.02,36.99 53.66,36.35 57.78,36.35 U1.6
PWM1
  Bottom 0.254: U2.8 55.4,78.26 54.93,78.26 51.91,81.28 51.91,82.87 50.8,83.98 TEENSY.2
PWM2
  Bottom 0.254: U2.7 55.4,76.99 55.09,76.99 50.64,81.44 TEENSY.3
PWM3
  Bottom 0.254: U2.6 55.4,75.72 53.98,75.72 50.8,78.9 TEENSY.4
PWM4
  Bottom 0.254: U2.5 55.4,74.45 52.7,74.45 50.8,76.36 TEENSY.5
PWM5
  Bottom 0.254: U2.4 55.4,73.18 51.44,73.18 50.8,73.82 TEENSY.6
PWM6
  Bottom 0.254: U2.3 55.4,71.75 51.12,71.75 50.8,71.44 TEENSY.7
PWM7
  Bottom 0.254: U2.2 55.4,70.48 52.39,70.48 50.8,68.9 TEENSY.8
PWM8
  Bottom 0.254: U2.1 55.4,69.22 53.66,69.22 50.8,66.36 TEENSY.9
PWM9  (via drill 0.38)
  Top 0.254: v32.23,41.59 34.61,41.59 34.61,42.55 35.4,43.34 TEENSY.37
  Bottom 0.254: v32.23,41.59 29.84,43.97 22.7,43.97 U$2.8
PWM10  (via drill 0.38)
  Top 0.254: v24.13,38.73 v24.13,45.24 | v35.56,22.86 35.88,22.54 35.88,17.62 v36.67,16.83 | v47.94,23.34 47.62,23.65 47.62,33.34 48.26,33.97 v48.26,38.73
  Bottom 0.254: v24.13,45.24 22.7,45.24 U$2.7 | v24.13,38.73 30.32,32.54 30.32,28.1 v35.56,22.86 | v36.67,16.83 37.15,16.83 38.1,17.78 40.16,17.78 42.86,20.48 47.78,20.48 48.26,20.95 48.26,23.02 v47.94,23.34 | v48.26,38.73 48.58,38.73 50.64,40.8 TEENSY.29
PWM11  (via drill 0.38)
  Top 0.254: v32.38,45.72 35.4,45.72 35.4,45.88 TEENSY.38
  Bottom 0.254: v32.38,45.72 27.46,45.72 26.67,46.51 22.7,46.51 U$2.6
PWM12  (via drill 0.38)
  Top 0.254: v27.3,31.91 v27.3,46.99 | v8.41,26.04 6.83,27.62 6.83,37.15 5.87,38.1 5.87,77.47 6.83,78.42 v6.83,79.85 | v19.21,80.49 20.16,79.53 20.16,76.52 v23.65,73.03 | v27.62,69.06 30.48,66.2 v30.48,62.87
  Bottom 0.254: v27.3,46.99 25.56,46.99 24.77,47.78 22.7,47.78 U$2.5 | v27.3,31.91 25.4,31.91 20.64,27.15 9.53,27.15 v8.41,26.04 | v6.83,79.85 10.48,79.85 11.11,80.49 v19.21,80.49 | v27.62,69.06 v23.65,73.03 | v30.48,62.87 32.07,61.28 35.4,61.28 TEENSY.14
PWM13  (via drill 0.38)
  Top 0.254: v25.72,47.94 26.04,47.62 26.04,25.88 25.08,24.92 25.08,14.76 v25.72,14.13 | v33.5,7.94 32.7,7.14 32.7,5.71 33.18,5.24 48.58,5.24 48.58,22.86 48.74,23.02 48.74,24.77 48.1,25.4 48.1,33.18 48.74,33.81 48.74,36.67 v49.05,36.99
  Bottom 0.254: v25.72,47.94 24.61,49.05 22.7,49.05 U$2.4 | v25.72,14.13 31.91,7.94 v33.5,7.94 | v49.05,36.99 49.37,36.99 50.64,38.26 TEENSY.30
PWM14  (via drill 0.38)
  Top 0.254: v21.11,50.48 20.32,51.28 20.32,58.1 21.43,59.21 v21.43,61.75 | v32.23,72.55 36.67,72.55 36.67,67.47 35.56,66.36 TEENSY.16
  Bottom 0.254: v21.11,50.48 22.54,50.48 U$2.3 | v32.23,72.55 v21.43,61.75
PWM15  (via drill 0.38)
  Top 0.254: v21.11,51.75 23.97,54.61 23.97,59.37 v25.24,60.64
  Bottom 0.254: v21.11,51.75 22.54,51.75 U$2.2 | v25.24,60.64 29.53,64.93 38.42,64.93 40.8,62.55 49.53,62.55 50.64,63.66 TEENSY.10
PWM16  (via drill 0.38)
  Top 0.254: v26.19,50.32 33.02,50.32 33.02,54.29 33.18,54.45 33.18,66.52 35.4,68.74 TEENSY.17
  Bottom 0.254: v26.19,50.32 23.65,52.86 22.7,52.86 U$2.1
PWM_1  (via drill 0.38)
  Top 0.61: v86.2,68.74 90.96,63.98 v90.96,48.42 | v92.55,46.83 92.55,7.62 86.04,1.11 77.95,1.11 77.95,6.51 STRIP1.5
  Bottom 0.61: v86.2,68.74 73.82,68.74 71.6,70.96 71.6,72.55 66.04,78.11 65.25,78.11 U2.13 | v92.55,46.83 v90.96,48.42
PWM_2  (via drill 0.38)
  Top 0.61: v66.52,76.2 66.04,75.72 v66.04,60.48 | v70.96,43.34 70.96,26.19 v73.03,24.13
  Bottom 0.61: v66.52,76.2 65.88,76.83 65.25,76.83 U2.14 | v66.04,60.48 68.9,57.63 68.9,45.4 v70.96,43.34 | v73.03,24.13 73.03,21.27 78.11,16.19 78.11,9.53 STRIP1.6
PWM_3  (via drill 0.38)
  Top 0.61: v63.5,75.56 64.93,75.56 64.93,60.17 66.83,58.26 v66.83,48.42 | v72.07,31.27 v72.07,40.96 | v81.12,28.26 81.92,29.05 81.92,31.59 STRIP2.5
  Bottom 0.61: v63.5,75.56 65.09,75.56 U2.15 | v66.83,48.42 66.83,46.04 71.91,40.96 v72.07,40.96 | v72.07,31.27 75.09,28.26 v81.12,28.26
PWM_4  (via drill 0.38)
  Top 0.61: v63.5,74.3 63.98,73.82 63.98,59.69 64.45,59.21 v64.45,46.04 | v73.18,37.62 74.61,36.2 v74.61,35.72
  Bottom 0.61: v63.5,74.3 65.09,74.3 U2.16 | v64.45,46.04 65.09,45.4 65.09,45.24 72.71,37.62 v73.18,37.62 | v74.61,35.72 75.09,35.72 76.36,36.99 81.12,36.99 81.92,36.2 81.92,34.45 STRIP2.6
PWM_5  (via drill 0.38)
  Top 0.61: v67.15,73.03 67.94,72.23 67.94,54.45 71.75,50.64 v71.75,45.72 | v79.06,40.64 81.92,43.5 81.92,45.56 STRIP3.5
  Bottom 0.61: v67.15,73.03 65.25,73.03 U2.17 | v71.75,45.72 76.83,40.64 v79.06,40.64
PWM_6
  Bottom 0.61: U2.18 65.09,71.75 64.29,71.75 63.66,71.12 63.66,68.74 65.88,66.52 86.68,66.52 89.69,63.5 89.69,58.58 82.07,50.96 82.07,48.42 STRIP3.6
PWM_7  (via drill 0.38)
  Top 0.61: v70.17,70.48 70.96,70.48 70.96,69.85 73.18,67.63 v73.18,65.41
  Bottom 0.61: v70.17,70.48 65.25,70.48 U2.19 | v73.18,65.41 76.99,65.41 77.15,65.56 86.2,65.56 88.74,63.02 88.74,59.05 87.79,58.1 83.5,58.1 82.07,59.53 STRIP4.5
PWM_8  (via drill 0.38)
  Top 0.61: v79.53,67.63 81.92,65.25 81.92,62.55 STRIP4.6
  Bottom 0.61: v79.53,67.63 70.33,67.63 68.74,69.22 65.25,69.22 U2.20
PWM_9  (via drill 0.38)
  Top 0.61: v15.88,44.13 15.88,53.5 19.21,56.83 19.21,67.47 STRIP5.5
  Bottom 0.61: v15.88,44.13 13.18,44.13 U$2.13
PWM_10
  Bottom 0.61: U$2.14 13.02,45.4 12.22,45.4 10.32,47.31 10.32,68.9 13.49,72.07 17.46,72.07 19.05,70.48 STRIP5.6
PWM_11  (via drill 0.38)
  Top 0.61: v14.76,45.56 14.76,40.8 16.19,39.37 v16.19,38.89 | v14.45,37.15 13.34,37.15 12.22,36.04 12.22,31.75 v13.02,30.96
  Bottom 0.61: v14.76,45.56 13.81,46.51 13.18,46.51 U$2.15 | v14.45,37.15 v16.19,38.89 | v13.02,30.96 17.3,30.96 18.89,32.54 STRIP6.5
PWM_12
  Bottom 0.61: U$2.16 13.18,47.78 13.97,47.78 18.89,42.86 18.89,35.4 STRIP6.6
PWM_13  (via drill 0.38)
  Top 0.61: v14.61,49.05 14.92,49.37 v14.92,58.1 | v20.32,59.37 v20.32,63.5
  Bottom 0.61: v14.61,49.05 13.18,49.05 U$2.17 | v20.32,63.5 v14.92,58.1 | v20.32,59.37 27.15,59.37 28.89,57.63 S1.A
PWM_14
  Bottom 0.61: U$2.18 13.18,50.32 14.76,50.32 21.11,43.97 21.11,40.01 24.13,36.99 24.77,36.99 28.89,32.86 28.89,24.61 S2.A
PWM_15  (via drill 0.38)
  Top 0.61: v50.96,93.19 52.23,93.19 v52.23,91.6
  Bottom 0.61: v50.96,93.19 49.05,95.09 36.99,95.09 33.5,91.6 33.5,72.39 21.75,60.64 20.16,60.64 16.99,57.47 16.99,56.83 18.1,55.72 18.1,52.55 17.3,51.75 13.18,51.75 U$2.19 | v52.23,91.6 52.23,89.85 57.63,84.45 57.63,67.63 59.69,65.56 59.69,58.26 59.05,57.63 S3.A
PWM_16  (via drill 0.38)
  Top 0.61: v16.99,52.86 22.23,47.62 v22.23,40.32 | v59.05,29.21 59.05,24.61 S4.A
  Bottom 0.61: v16.99,52.86 13.18,52.86 U$2.20 | v22.23,40.32 24.13,40.32 34.29,30.16 58.1,30.16 v59.05,29.21
RELAY-PWR  (via drill 0.38)
  Top 1.27: v66.83,79.22 59.85,79.22 v59.85,81.92
  Bottom 1.27: v66.83,79.22 72.87,73.18 72.87,71.6 RELAY1.8 | v59.85,81.92 59.85,85.57 58.26,87.15 58.26,89.06 50.01,97.31 32.86,97.31 26.19,90.65 26.19,88.42 J3.PWR
S1  (via drill 0.38)
  Top 0.254: v27.46,7.78 34.45,14.76 34.45,15.4 34.29,15.56 34.29,23.34 34.92,23.97 34.92,32.7 35.4,33.18 TEENSY.33 | v5.08,13.81 5.08,26.99 3.33,28.73 SERVO1.3
  Bottom 0.254: v27.46,7.78 25.88,7.78 25.72,7.94 21.27,7.94 20,6.67 J4.5 19.84,6.51 18.41,5.08 13.81,5.08 v5.08,13.81
S2  (via drill 0.38)
  Top 0.254: v36.2,10.95 36.2,14.92 34.77,16.35 34.77,23.18 35.4,23.81 35.4,28.26 36.67,29.53 36.67,34.61 35.56,35.72 TEENSY.34 | v28.26,12.86 26.51,11.11 26.51,8.89 25.56,7.94 20.32,7.94 | 20.32,7.94 20,7.94 20,9.37 J4.6 | v15.56,18.73 15.88,18.73 18.57,16.03 20.32,16.03 20.32,7.94
  Bottom 0.254: v36.2,10.95 30.16,10.95 v28.26,12.86 | v15.56,18.73 7.46,18.73 5.08,21.11 3.33,21.11 SERVO2.3
TINY_LED  (via drill 0.38)
  Top 0.254: v55.4,63.66 56.99,62.07 56.99,61.59 60.96,61.59 63.66,58.9 63.66,52.07 63.5,51.91 63.5,38.42 65.41,36.51 U1.3 | v46.04,69.22 46.51,69.69 46.51,91.28 44.13,93.66 R1.1
  Bottom 0.254: v55.4,63.66 52.39,63.66 51.12,64.93 50.32,64.93 v46.04,69.22
TINY_RELAY  (via drill 0.38)
  Top 0.254: v52.55,41.59 52.07,42.07 50.32,42.07 49.53,42.86 49.53,46.2 48.42,47.31 48.42,63.66 49.05,64.29 49.05,87.79 52.23,87.79 55.4,90.96 61.12,90.96 63.82,93.66 73.98,93.66 86.52,81.12 86.52,70.17 89.38,70.17 90.65,71.44 RELAY1.1
  Bottom 0.254: v52.55,41.59 55.09,39.05 57.78,39.05 U1.7
TINY_SWITCH  (via drill 0.38)
  Top 0.254: v52.55,34.77 52.39,34.61 v52.39,25.72
  Bottom 0.254: v52.55,34.77 54.93,34.77 55.72,33.97 57.78,33.97 U1.5 | v52.39,25.72 50.8,24.13 45.24,24.13 44.13,23.02 SW2.2

## Text on the board
tPlace: +5V OUT (to Pi) | +5V IN (Main) | +5V IN (pi) | MO Teensy Breakout | 2017 Ali Momeni, Designed in Pittsburgh | v2-3b | v2-3b
bPlace: MO Teensy Breakout | 2017 Ali Momeni, Designed in Pittsburgh
tValues: AN8 | GND | AN10 | VCC | GND | AN7 | VCC | GND | AN9 | VCC | GND | AN6 | VCC | GND | AN11 | VCC | AN5 | GND | GND | VCC | AN12 | VCC | GND | AN4 | VCC | GND | VCC | AN3 | GND | VCC | AN2 | GND | VCC | AN1 | GND | VCC